# Altium PCB Mako DSP R1.0.PcbDoc
Units mil, origin at the board's own origin, x right, y up, seen from the top; angles counter-clockwise.
Board outline 3500 x 2100 mil, 2 copper layers (Top Layer, Bottom Layer); 165 components, 126 nets, 631 pads, 38 vias.
Unrouted connection lines stored in the file: 359.
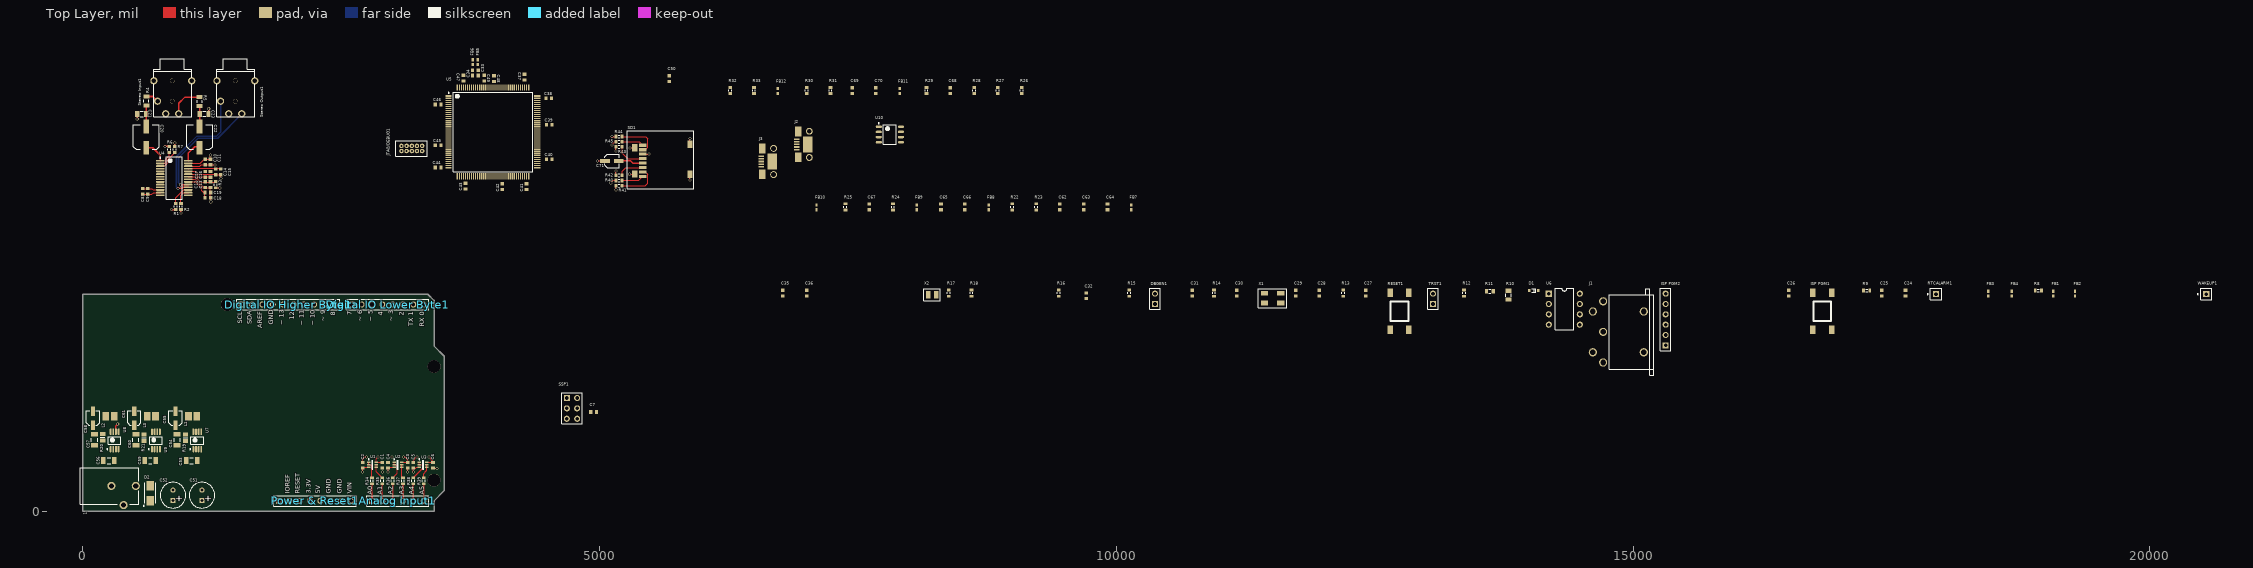
[diagram p0: Top Layer view]
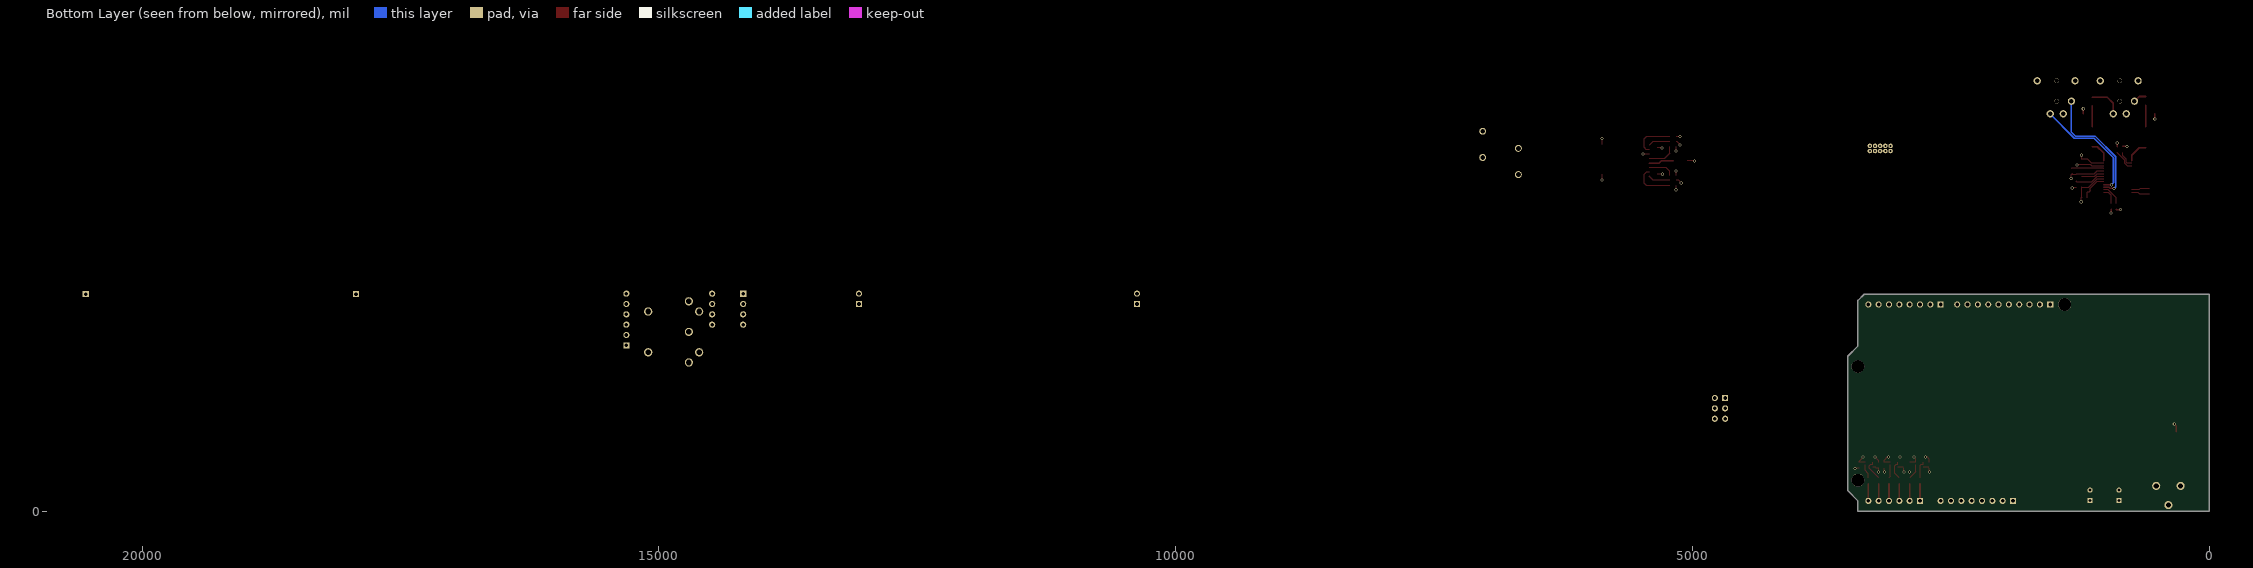
[diagram p1: Bottom Layer view, seen from below]

## Layer stack, top to bottom
Top Layer: signal copper 1.4
Dielectric: dielectric 12.6, FR-4, Dk 4.8
Bottom Layer: signal copper 1.4

## Board outline
0,0 0,2100 3340,2100 3400,2040 3400,1600 3500,1500 3500,200 3400,100 3400,0

## Design rules (kind name [scope] priority, off if disabled: settings)
Clearance [All] p1: gap=6
ComponentClearance [All] p1: gap=0 collisioncheckmode=3 verticalgap=10 showdistances=FALSE
DiffPairsRouting [All] p1: maxlimit=10 minlimit=10 mostfreqgap=10 maxuncoupledlength=500
FanoutControl Fanout_SOIC [(InComponent('U8') AND InComponent('U7'))] p3: bgadir=Out bgaviamode=Centered fanoutstyle=Staggered fanoutdirection=Alternating viagrid=1 // Fanout_SOIC (Default Rule)
FanoutControl Fanout_Small [All] p4: bgadir=Out bgaviamode=Centered fanoutstyle=Auto fanoutdirection=Alternating viagrid=1 // Fanout_Small (Default Rule)
HoleSize [All] p1: absolutevalues=TRUE maxlimit=120 minlimit=1 maxpercent=80.000 minpercent=20.000
MinimumSolderMaskSliver [All] p1 off: minsoldermaskwidth=10
PlaneConnect [All] p1: planeconnectstyle=Direct reliefexpansion=20 reliefentries=4 reliefconductorwidth=10 reliefairgap=10
PolygonConnect [All] p1: connectstyle=Relief reliefconductorwidth=10 reliefentries=4 polygonreliefangle="90 Angle"
RoutingVias [All] p1: holewidth=15 width=25 viastyle="Through Hole" minholewidth=15 minwidth=25 maxholewidth=28 maxwidth=50
SilkToSilkClearance [All] p1 off: silktosilkclearance=10
SilkscreenOverComponentPads [All] p1 off: minsilkscreentomaskgap=10
SolderMaskExpansion [All] p1: expansion=4
Width [All] p1: maxlimit=30 minlimit=6 preferedwidth=6 minimp=50.000000 maximp=50.000000 favimp=50.000000
19 further rules are at their usual default settings.

## Classes and differential pairs
component class "Mako DSP USB": C62 C63 C64 C65 C66 C67 C68 C69 C70 FB7 FB8 FB9 FB10 FB11 FB12 J2 J3 R22 R23 R24 R25 R26 R27 R28 R29 R30 R31 R32 R33 U10
component class "Mako DSP Power": 1 12VDC/VCCIN C51 C52 C53 C54 C55 C56 C57 C58 C59 C60 C61 D2 D? L1 L2 L3 L? R19 R20 R21 U7 U8 U9
component class "Mako DSP Main": C24 C25 C26 C27 C28 C29 C30 C31 C32 C33 C34 C35 C36 C37 C38 C39 C40 C41 C42 C43 C44 C45 C46 C47 C48 C49 C50 C71 D1 DBGEN1 FB1 FB2 FB3 FB4 FB5 FB6 "ISP PGM" "ISP PGM1" "ISP PGM2" J1 JTAG/DEBUG1 R8 R9 R10 R11 R12 R13 R14 R15 R16 R17 R18 R40 R41 R42 R43 R44 R45 RESET RESET1 RTCALARM1 SD1 TRST1 U5 U6 WAKEUP1 X1 X2
component class "Mako DSP Audio Codec": C8 C9 C10 C11 C12 C13 C14 C15 C16 C17 C18 C19 C20 C21 C22 C23 R1 R2 R3 R4 R5 R6 R7 "Stereo Input1" "Stereo Input?" "Stereo Output1" "Stereo Output?" U4
component class "Mako DSP Arduio IO": "Analog Input1" "Analog Input?" C1 C2 C3 C4 C5 C6 C7 "Digital IO Higher Byte1" "Digital IO Higher Byte?" "Digital IO Lower Byte1" "Digital IO Lower Byte?" "Power & Reset1" "Power & Reset?" R34 R35 R36 R37 R38 R39 SSP1 SSP? U1 U2 U3
differential pair USB0: +USB0_P -USB0_N
differential pair USB1: +USB1_P -USB1_N
differential pair USB_1: +USB_1_P -USB_1_N

## Components (designator, comment, footprint, x,y, rotation, side; value= is the part's Value field where it differs from the comment)
1 "Center-positive 2.1 mm power jack" PJ-102AH 515,245 r90 top
"Analog Input1" "Arduino Leonardo Analog" "Arduino Leonardo Analog" 2800,100 r0 top locked
C1 "Cap Semi" 1608[0603] 2900,445 r90 top
C2 "Cap Semi" 1608[0603] 2710,445 r270 top
C3 "Cap Semi" 1608[0603] 3145,445 r90 top
C4 "Cap Semi" 1608[0603] 2955,445 r270 top
C5 "Cap Semi" 1608[0603] 3200,445 r270 top
C6 "Cap Semi" 1608[0603] 3390,445 r90 top
C7 "Cap Semi" 1608[0603] 4945,960 r0 top
C8 "Cap Semi" 1608[0603] 582.01,3093.9 r270 top
C9 "Cap Semi" 1608[0603] 632.01,3093.9 r270 top
C10 "Cap Semi" 1608[0603] 1187.01,3378.9 r270 top
C11 "Cap Semi" 1608[0603] 1237.01,3378.9 r270 top
C12 "Cap Semi" 1608[0603] 1187.01,3158.9 r90 top
C13 "Cap Semi" 1608[0603] 1237.01,3158.9 r90 top
C14 "Cap Semi" 1608[0603] 1287.01,3283.9 r90 top
C15 "Cap Semi" 1608[0603] 1337.01,3283.9 r90 top
C16 "Cap Semi" 1608[0603] 1237.01,3258.9 r270 top
C17 "Cap Semi" 1608[0603] 1187.01,3258.9 r270 top
C18 "Cap Semi" 1608[0603] 1212.01,3033.9 r180 top
C19 "Cap Semi" 1608[0603] 1212.01,3083.9 r180 top
C20 "Cap Semi" "Panasonic VS D" 617.01,3618.9 r270 top
C21 "Cap Semi" "SM 0805 - gap trimmed" 572.01,3843.9 r0 top
C22 "Cap Semi" "Panasonic VS D" 1132.01,3618.9 r270 top
C23 "Cap Semi" "SM 0805 - gap trimmed" 1177.01,3843.9 r180 top
C24 "Cap Semi" 1608[0603] 17635,2110 r90 top
C25 "Cap Semi" 1608[0603] 17405,2110 r90 top
C26 "Cap Semi" CAPC1608L 16505,2110 r90 top
C27 "Cap Semi" CAPC1608L 12415,2110 r90 top
C28 "Cap Semi" CAPC1608L 11965,2110 r90 top
C29 "Cap Semi" CAPC1608L 11735,2110 r90 top
C30 "Cap Semi" 1608[0603] 11165,2110 r90 top
C31 "Cap Semi" 1608[0603] 10735,2110 r90 top
C32 "Cap Semi" CAPC1608L 9710,2085 r90 top
C33 "Cap Semi" 1608[0603] 3800,4265 r180 top
C34 "Cap Semi" 1608[0603] 3800,4215 r180 top
C35 "Cap Semi" 1608[0603] 6775,2110 r90 top
C36 "Cap Semi" 1608[0603] 7005,2110 r90 top
C37 "Cap Semi" 1608[0603] 4275,4200 r270 top
C38 "Cap Semi" 1608[0603] 4510,3995 r180 top
C39 "Cap Semi" 1608[0603] 4515,3740 r180 top
C40 "Cap Semi" 1608[0603] 4515,3405 r180 top
C41 "Cap Semi" 1608[0603] 4295,3140 r90 top
C42 "Cap Semi" 1608[0603] 4060,3140 r90 top
C43 "Cap Semi" 1608[0603] 3705,3145 r90 top
C44 "Cap Semi" 1608[0603] 3440,3325 r0 top
C45 "Cap Semi" 1608[0603] 3440,3540 r0 top
C46 "Cap Semi" 1608[0603] 3440,3935 r0 top
C47 "Cap Semi" 1608[0603] 3685,4190 r270 top
C48 "Cap Semi" 1608[0603] 3980,4185 r270 top
C49 "Cap Semi" 1608[0603] 3885,4190 r270 top
C50 "Cap Semi" 1608[0603] 5675,4185 r90 top
C51 "Cap Pol1" CAPPR2.5-6.3x5 1155,155 r90 top
C52 "Cap Pol1" CAPPR2.5-6.3x5 875,155 r90 top
C53 "Cap Semi" C1206 1055,490 r0 top
C54 "Cap Semi" C1206 915,690 r90 top
C55 "Cap Semi" "Panasonic VS B" 900,900 r270 top
C56 "Cap Semi" C1206 255,490 r0 top
C57 "Cap Semi" C1206 115,690 r90 top
C58 "Cap Semi" "Panasonic VS B" 100,900 r270 top
C59 "Cap Semi" C1206 655,490 r0 top
C60 "Cap Semi" C1206 515,690 r90 top
C61 "Cap Semi" "Panasonic VS B" 500,900 r270 top
C62 "Cap Semi" 1608[0603] 9455,2945 r90 top
C63 "Cap Semi" 1608[0603] 9685,2945 r90 top
C64 "Cap Semi" 1608[0603] 9915,2945 r90 top
C65 "Cap Semi" 1608[0603] 8305,2945 r90 top
C66 "Cap Semi" 1608[0603] 8535,2945 r90 top
C67 "Cap Semi" 1608[0603] 7610,2945 r90 top
C68 "Cap Semi" 1608[0603] 8395,4070 r90 top
C69 "Cap Semi" 1608[0603] 7445,4070 r90 top
C70 "Cap Semi" 1608[0603] 7675,4070 r90 top
C71 "Cap Semi" "Panasonic VS B" 5120,3390 r180 top
D1 "Diode" "SMT diode" 14040,2135 r0 top
D2 "PMEG4050EP" PMEG4050EP 655,175 r90 top
DBGEN1 "Header 2" HDR1X2 10375,2005 r90 top
"Digital IO Higher Byte1" "Arduino Leonardo High Byte" "Arduino Leonardo High Byte" 1540,2000 r0 top locked
"Digital IO Lower Byte1" "Arduino Leonardo Low Byte" "Arduino Leonardo Low Byte" 2600,2000 r0 top locked
FB1 "BLM15HG601SN1D" BLM18PG121SN1D 19065,2105 r90 top
FB2 "BLM15HG601SN1D" BLM18PG121SN1D 19275,2105 r90 top
FB3 "BLM15HG601SN1D" BLM18PG121SN1D 18435,2105 r90 top
FB4 "BLM15HG601SN1D" BLM18PG121SN1D 18665,2105 r90 top
FB5 "BLM15HG601SN1D" BLM18PG121SN1D 3825,4345 r270 top
FB6 "BLM15HG601SN1D" BLM18PG121SN1D 3775,4345 r270 top
FB7 "BLM15HG601SN1D" BLM18PG121SN1D 10145,2940 r90 top
FB8 "BLM15HG601SN1D" BLM18PG121SN1D 8765,2940 r90 top
FB9 "BLM15HG601SN1D" BLM18PG121SN1D 8070,2940 r90 top
FB10 "BLM15HG601SN1D" BLM18PG121SN1D 7100,2940 r90 top
FB11 "BLM15HG601SN1D" BLM18PG121SN1D 7905,4065 r90 top
FB12 "BLM15HG601SN1D" BLM18PG121SN1D 6725,4065 r90 top
"ISP PGM1" "Tactile Switch" TL3301 16830,1935 r0 top
"ISP PGM2" "Header 6" HDR1X6 15315,1605 r90 top
J1 "5 Pin DIN jack" "Kobiconn 5 pin DIN" 14710,1735 r90 top
J2 "DX4R005J91R5100" "Micro USB Circular Holes Only" 7070,3550 r90 top
J3 "DX4R005J91R5100" "Micro USB Circular Holes Only" 6725,3385 r90 top
JTAG/DEBUG1 "S9015E-05-ND" S9015E-05-ND 3285,3485 r180 top
L1 "Inductor" VLS252012T-2R2M1R3 1065,920 r180 top
L2 "Inductor" VLS252012T-2R2M1R3 265,920 r180 top
L3 "Inductor" VLS252012T-2R2M1R3 665,920 r180 top
"Power & Reset1" "Arduino Leonardo Power" "Arduino Leonardo Power" 1900,100 r0 top locked
R1 "Res3" J1-0603 902.01,2948.9 r270 top
R2 "Res3" J1-0603 952.01,2948.9 r270 top
R3 "Res3" J1-0603 1287.01,3158.9 r270 top
R4 "Res3" "SM 0805 - gap trimmed" 617.01,3968.9 r90 top
R5 "Res3" "SM 0805 - gap trimmed" 1132.01,3963.9 r90 top
R6 "Res3" J1-0603 837.01,3498.9 r270 top
R7 "Res3" J1-0603 892.01,3498.9 r270 top
R8 "Res3" J1-0603 18920,2135 r0 top
R9 "Res3" J1-0603 17260,2135 r0 top
R10 "res 220" "SM 0805 - gap trimmed" 13795,2090 r90 top
R11 "res 1k" "SM 0603" 13580,2130 r0 top
R12 "Res3" J1-0603 13365,2110 r90 top
R13 "Res3" J1-0603 12195,2110 r90 top
R14 "Res3" J1-0603 10945,2110 r90 top
R15 "Res3" J1-0603 10125,2110 r90 top
R16 "Res3" J1-0603 9445,2110 r90 top
R17 "Res3" J1-0603 8380,2110 r90 top
R18 "Res3" J1-0603 8600,2110 r90 top
R19 "Res3" RESC2012L 995,710 r90 top
R20 "Res3" RESC2012L 195,715 r90 top
R21 "Res3" RESC2012L 595,710 r90 top
R22 "Res3" J1-0603 8995,2945 r90 top
R23 "Res3" J1-0603 9225,2945 r90 top
R24 "Res3" J1-0603 7840,2945 r90 top
R25 "Res3" J1-0603 7380,2945 r90 top
R26 "Res3" J1-0603 9085,4070 r90 top
R27 "Res3" J1-0603 8855,4070 r90 top
R28 "Res3" J1-0603 8625,4070 r90 top
R29 "Res3" J1-0603 8165,4070 r90 top
R30 "Res3" J1-0603 7005,4070 r90 top
R31 "Res3" J1-0603 7235,4070 r90 top
R32 "Res3" J1-0603 6265,4070 r90 top
R33 "Res3" J1-0603 6495,4070 r90 top
R34 "Res3" J1-0603 2800,295 r90 top
R35 "Res3" J1-0603 2900,295 r90 top
R36 "Res3" J1-0603 3000,295 r90 top
R37 "Res3" J1-0603 3100,295 r90 top
R38 "Res3" J1-0603 3200,295 r90 top
R39 "Res3" J1-0603 3300,295 r90 top
R40 "Res3" J1-0603 5190,3200 r0 top
R41 "Res3" J1-0603 5190,3150 r0 top
R42 "Res3" J1-0603 5190,3250 r0 top
R43 "Res3" J1-0603 5190,3525 r0 top
R44 "Res3" J1-0603 5190,3625 r0 top
R45 "Res3" J1-0603 5190,3575 r0 top
RESET1 "Tactile Switch" TL3301 12740,1935 r0 top
RTCALARM1 "Socket" PIN1 17930,2100 r90 top
SD1 "JAE SJ107021" "JAE SJ107021" 5875,3390 r0 top
SSP1 "Arduino Leonardo ICSP" "Arduino ICPS" 4685,1095 r0 top
"Stereo Input1" "CUI 43515TS" "CUI SJ-43515TS" 867.01,4163.9 r270 top
"Stereo Output1" "CUI 43515TS" "CUI SJ-43515TS" 1477.01,4163.9 r270 top
TRST1 "Header 2" HDR1X2 13065,2005 r90 top
U1 "BAV70S SOT-363" BAV70S_SOT363 2805,450 r0 top
U2 "BAV70S SOT-363" BAV70S_SOT363 3050,450 r0 top
U3 "BAV70S SOT-363" BAV70S_SOT363 3295,450 r0 top
U4 "WM8778" WM8778 887.01,3223.9 r0 top
U5 "LPC4330FBD144" SOT486-1_V 3970,3670 r0 top
U6 "6N138 optocoupler" DIP8 14185,2105 r0 top
U7 "TPS62162SOP" TPS62162SOP 1110,685 r90 top
U8 "TPS62163SOP" TPS62162SOP 310,685 r90 top
U9 "TPS62162SOP" TPS62162SOP 710,685 r90 top
U10 "LM3526-H" LM3526 7810,3645 r0 top
WAKEUP1 "Socket" PIN1 20545,2100 r90 top
X1 "ABM3B-12.000MHZ-B2-T" ABM3B-12.000MHZ-B2-T 11435,2015 r0 top
X2 "ABS07-32.768KHZ-T" ABS07-32.768KHZ-T 8180,2095 r0 top

## Footprints (in the part's own frame and the unit in brackets; to place one, negate y for a bottom-side part, rotate by r counter-clockwise, add the part's x,y. Pads: shape width x height; smd on the part's side, far side on the other; paste and mask are expansions set on the pad)
1608[0603] [mm] "Chip Capacitor, Body 1.6x0.8mm, IPC High Density"
  rect 0.8x0.9 smd: 1(-0.7,0) 2(0.7,0)
  body extent -0.87,-0.48 0.87,0.48, height 1.3
ABM3B-12.000MHZ-B2-T [mm] "ABM3B-12.000MHZ-B2-T 12MHZ Crystam Oscillator"
  rect 1.8x1.2 smd: 1(0,0) 2(4,0) 3(4,2.4) 4(0,2.4)
  silkscreen extent -1.5,-1.2 5.5,3.5
ABS07-32.768KHZ-T [mm] "ABS07-32.768KHZ-T Crystal Oscillator"
  rect 1.1x1.9 smd: 1(0,0) 2(1.95,0)
  silkscreen extent -1.1,-1.5 3,1.5
"Arduino ICPS" [mm]
  round 1 on Top Overlay: 1(-1.778,1.778)
  rect 1.5x1.5 hole 0.9: 1(0,0)
  round 1.5 hole 0.9: 2(2.54,0) 3(0,-2.54) 4(2.54,-2.54) 5(0,-5.08) 6(2.54,-5.08)
  silkscreen extent -1.27,-6.35 3.81,1.27
"Arduino Leonardo Analog" [mm] "Connector; Header; 6 Position"
  rect 1.5x1.5 hole 0.9: 1(0,0)
  round 1.5 hole 0.9: 2(2.54,0) 3(5.08,0) 4(7.62,0) 5(10.16,0) 6(12.7,0)
  silkscreen extent -1.27,-1.27 13.97,1.27
"Arduino Leonardo High Byte" [mm]
  rect 1.5x1.5 hole 0.9: 1(0,0)
  round 1.5 hole 0.9: 2(2.54,0) 3(5.08,0) 4(7.62,0) 5(10.16,0) 6(12.7,0) 7(15.24,0) 8(17.78,0) 9(20.32,0) 10(22.86,0)
  silkscreen extent -1.27,-1.27 24.13,1.27
"Arduino Leonardo Low Byte" [mm] "Connector; Header; 8 Position"
  rect 1.5x1.5 hole 0.9: 1(0,0)
  round 1.5 hole 0.9: 2(2.54,0) 3(5.08,0) 4(7.62,0) 5(10.16,0) 6(12.7,0) 7(15.24,0) 8(17.78,0)
  silkscreen extent -1.27,-1.27 19.05,1.27
"Arduino Leonardo Power" [mm] "Connector; Header; 8 Position"
  rect 1.5x1.5 hole 0.9: 1(0,0)
  round 1.5 hole 0.9: 2(2.54,0) 3(5.08,0) 4(7.62,0) 5(10.16,0) 6(12.7,0) 7(15.24,0) 8(17.78,0)
  silkscreen extent -1.27,-1.27 19.05,1.27
BAV70S_SOT363 [mm] "SOT23, 6-Leads, Body 2.2x2.2mm (max), Pitch 0.65mm, IPC Medium Density"
  rect 0.85x0.35 smd: 1(-0.925,0.65) 2(-0.925,0) 3(-0.925,-0.65) 4(0.925,-0.65) 5(0.925,0) 6(0.925,0.65)
  silkscreen extent -1.05,-1.1 0.1,1.5, body extent -0.67,-1.1 0.67,1.1, height 1.1
BLM18PG121SN1D [mm] "Chip Inductor, 2-Leads, Body 1.0x0.5mm, IPC Medium Density"
  rect 0.8x0.6 smd: 1(-0.6,0) 2(0.6,0)
  body extent -0.52,-0.28 0.53,0.27, height 0.6
C1206 [mm] "Chip Capacitor, Body 3.2x1.6mm, IPC High Density"
  rect 1.1x1.7 smd: 1(-1.35,0) 2(1.35,0)
  silkscreen extent -0.4,-0.75 0.4,0.75, body extent -1.7,-0.9 1.7,0.9, height 1.3
CAPC1608L [mm] "Chip Capacitor, Body 1.6x0.8mm, IPC High Density"
  rect 0.8x0.9 smd: 1(-0.7,0) 2(0.7,0)
  body extent -0.87,-0.48 0.87,0.48, height 0.85
CAPPR2.5-6.3x5 [mm] "Capacitor, Electrolytic, Radial; Body 6.3 x 5 mm (Dia.xH typ); Pin Spacing 2.5 mm (typ)"
  rect 1.25x1.25 hole 0.75: 1(-1.25,0)
  round 1.25 hole 0.75: 2(1.25,0)
  silkscreen extent -3.15,-3.15 3.15,3.15
"CUI SJ-43515TS" [mm]
  round 1.778 hole 1.1: 1(8.1,1.6) 3(8.1,-1.6) 4(5,-3.6) 5(0,4.8) 6(0,-4.5)
  round 1.1 hole 1.1: ""(0,0) ""(5,0)
  silkscreen extent -5.4,-4.5 8.8,4.8
DIP8 [mil]
  rect 60x60 hole 35: 1(0,0)
  round 60 hole 35: 2(0,-100) 3(0,-200) 4(0,-300) 5(300,-300) 6(300,-200) 7(300,-100) 8(300,0)
  silkscreen extent 60,-350 240,50
HDR1X2 [mm] "Connector; Header; 2 Position"
  rect 1.5x1.5 hole 0.9: 1(0,0)
  round 1.5 hole 0.9: 2(2.54,0)
  silkscreen extent -1.27,-1.27 3.81,1.27
HDR1X6 [mm] "Connector; Header; 6 Position"
  rect 1.5x1.5 hole 0.9: 1(0,0)
  round 1.5 hole 0.9: 2(2.54,0) 3(5.08,0) 4(7.62,0) 5(10.16,0) 6(12.7,0)
  silkscreen extent -1.27,-1.27 13.97,1.27
J1-0603 [mm] "Chip Resistor, Body 1.6x0.8mm, IPC High Density"
  rect 0.7x0.9 smd: 1(-0.75,0) 2(0.75,0)
  silkscreen extent -0.2,-0.35 0.2,0.35, body extent -0.85,-0.48 0.85,0.48, height 0.9
"JAE SJ107021" [mm] "MicroSD card socket"
  rect 1.8x0.8 smd: 1(-11.55,-3.85) 2(-11.55,-2.75) 3(-11.55,-1.65) 4(-11.55,-0.55) 5(-11.55,0.55) 6(-11.55,1.65) 7(-11.55,2.75) 8(-11.55,3.85)
  rect 1.2x1.8 smd: 9(0,-3.3) 10(0,4.05)
  rect 1.4x1.8 smd: 11(-13.55,-3.25) 12(-13.55,3.25)
  silkscreen extent -15.35,-6.8 0.95,7.45, body extent -15.25,-6.75 1,7.5, height 2
"Kobiconn 5 pin DIN" [mil]
  round 80 hole 55: 1(295.5,0) 2(0,0) 3(-295.5,0) 4(197,99) 5(-197,99) E(-197,-394) E(197,-394)
  silkscreen extent -420,-492 419,-60
LM3526 [mm] "TSOP, 8-Leads, Body 4.9x3.9mm (max), Pitch 1.27mm, IPC Medium Density"
  oval 1.5x0.6 smd: 1(-2.725,1.905) 2(-2.725,0.635) 3(-2.725,-0.635) 4(-2.725,-1.905) 5(2.725,-1.905) 6(2.725,-0.635) 7(2.725,0.635) 8(2.725,1.905)
  silkscreen extent -2.85,-2.45 1.57,2.88, body extent -1.95,-2.45 1.95,2.45, height 1.45
"Micro USB Circular Holes Only" [mm]
  rect 0.4x1.35 smd: 1(1.275,4.025) 2(0.625,4.025) 3(-0.025,4.025) 4(-0.675,4.025) 5(-1.325,4.025)
  rect 2.4x1.6 smd: 6(3.125,3.75) 9(-3.175,3.75)
  round 1.7 hole 1.2: 7(3.2,1) 8(-3.25,1)
  rect 4x2.3 smd: GND(-0.025,1.35)
"Panasonic VS B" [mm]
  rect 2.4x1 smd: 1(1.7,0) 2(-1.7,0)
  silkscreen extent -1.83,-1.65 1.78,1.65
"Panasonic VS D" [mm]
  rect 3.4x1.4 smd: 1(2.6,0) 2(-2.6,0)
  silkscreen extent -3,-3.2 3,3.2
PIN1 [mm] "Connector; Plug"
  rect 1.5x1.5 hole 0.9: 1(0,0)
  silkscreen extent -1.4,-1.4 1.4,2.17
PJ-102AH [mm] "Center positive 2.1 mm power jack"
  round 2 hole 1.27: 1(0,0) 2(0,6) 3(-4.7,3)
  silkscreen extent -4.5,-0.7 4.5,13.7, body extent -5.8,-0.7 4.5,13.7, height 11
PMEG4050EP [mm] "PMEG4050EP NXP SMD Schottky Diode"
  rect 2.35x1.85 smd: 1(-1.825,0) 2(1.825,0)
  silkscreen extent -3.27,-1.4 2.5,1.67, body extent -2.5,-1.35 2.5,1.35, height 1.1
RESC2012L [mm] "Chip Resistor, Body 2.0x1.3mm, IPC High Density"
  rect 1x1.3 smd: 1(-0.8,0) 2(0.8,0)
  silkscreen extent 0,-0.55 0,0.55, body extent -1.07,-0.7 1.07,0.7, height 0.65
S9015E-05-ND [mm] "10 Pin Cortex JTAG Debug Header"
  round 1.1 hole 0.508: 1(5.08,0) 2(5.08,-1.27) 3(3.81,0) 4(3.81,-1.27) 5(2.54,0) 6(2.54,-1.27) 7(1.27,0) 8(1.27,-1.27) 9(0,0) 10(0,-1.27)
  round 0.5 on Top Overlay: 1(7,0.8)
  silkscreen extent -1.25,-2.5 6.5,1.25
"SM 0603" [mm]
  rect 0.75x1.1 smd: 1(0,0) 2(1.704,0)
  silkscreen extent 0.6,-0.5 1.1,0.5
"SM 0805 - gap trimmed" [mm]
  rect 1x1.5 smd: 1(-1.1,0) 2(1.1,0)
  silkscreen extent -0.36,-0.64 0.35,0.63
"SMT diode" [mm]
  rect 0.63x0.83 smd: 1(-1.115,0) 2(1.115,0)
  silkscreen extent -0.5,-0.4 0.5,0.5
SOT486-1_V [mm] "Thin QFP, 144-Leads, Body 20x20mm, Pitch 0.5mm, NXP Recommended"
  rect 1.5x0.4 smd: 1(-10.9,8.81) 36(-10.9,-8.81) 73(10.9,-8.81) 108(10.9,8.81)
  rect 1.5x0.28 smd: 2(-10.9,8.25) 3(-10.9,7.75) 4(-10.9,7.25) 5(-10.9,6.75) 6(-10.9,6.25) 7(-10.9,5.75) 8(-10.9,5.25) 9(-10.9,4.75) 10(-10.9,4.25) 11(-10.9,3.75) 12(-10.9,3.25) 13(-10.9,2.75) 14(-10.9,2.25) 15(-10.9,1.75) 16(-10.9,1.25) 17(-10.9,0.75) 18(-10.9,0.25) 19(-10.9,-0.25) 20(-10.9,-0.75) 21(-10.9,-1.25) 22(-10.9,-1.75) 23(-10.9,-2.25) 24(-10.9,-2.75) 25(-10.9,-3.25) 26(-10.9,-3.75) 27(-10.9,-4.25) 28(-10.9,-4.75) 29(-10.9,-5.25) 30(-10.9,-5.75) 31(-10.9,-6.25) 32(-10.9,-6.75) 33(-10.9,-7.25) 34(-10.9,-7.75) 35(-10.9,-8.25) 74(10.9,-8.25) 75(10.9,-7.75) 76(10.9,-7.25) 77(10.9,-6.75) 78(10.9,-6.25) 79(10.9,-5.75) 80(10.9,-5.25) 81(10.9,-4.75) 82(10.9,-4.25) 83(10.9,-3.75) 84(10.9,-3.25) 85(10.9,-2.75) 86(10.9,-2.25) 87(10.9,-1.75) 88(10.9,-1.25) 89(10.9,-0.75) 90(10.9,-0.25) 91(10.9,0.25) 92(10.9,0.75) 93(10.9,1.25) 94(10.9,1.75) 95(10.9,2.25) 96(10.9,2.75) 97(10.9,3.25) 98(10.9,3.75) 99(10.9,4.25) 100(10.9,4.75) 101(10.9,5.25) 102(10.9,5.75) 103(10.9,6.25) 104(10.9,6.75) 105(10.9,7.25) 106(10.9,7.75) 107(10.9,8.25)
  rect 0.4x1.5 smd: 37(-8.81,-10.9) 72(8.81,-10.9) 109(8.81,10.9) 144(-8.81,10.9)
  rect 0.28x1.5 smd: 38(-8.25,-10.9) 39(-7.75,-10.9) 40(-7.25,-10.9) 41(-6.75,-10.9) 42(-6.25,-10.9) 43(-5.75,-10.9) 44(-5.25,-10.9) 45(-4.75,-10.9) 46(-4.25,-10.9) 47(-3.75,-10.9) 48(-3.25,-10.9) 49(-2.75,-10.9) 50(-2.25,-10.9) 51(-1.75,-10.9) 52(-1.25,-10.9) 53(-0.75,-10.9) 54(-0.25,-10.9) 55(0.25,-10.9) 56(0.75,-10.9) 57(1.25,-10.9) 58(1.75,-10.9) 59(2.25,-10.9) 60(2.75,-10.9) 61(3.25,-10.9) 62(3.75,-10.9) 63(4.25,-10.9) 64(4.75,-10.9) 65(5.25,-10.9) 66(5.75,-10.9) 67(6.25,-10.9) 68(6.75,-10.9) 69(7.25,-10.9) 70(7.75,-10.9) 71(8.25,-10.9) 110(8.25,10.9) 111(7.75,10.9) 112(7.25,10.9) 113(6.75,10.9) 114(6.25,10.9) 115(5.75,10.9) 116(5.25,10.9) 117(4.75,10.9) 118(4.25,10.9) 119(3.75,10.9) 120(3.25,10.9) 121(2.75,10.9) 122(2.25,10.9) 123(1.75,10.9) 124(1.25,10.9) 125(0.75,10.9) 126(0.25,10.9) 127(-0.25,10.9) 128(-0.75,10.9) 129(-1.25,10.9) 130(-1.75,10.9) 131(-2.25,10.9) 132(-2.75,10.9) 133(-3.25,10.9) 134(-3.75,10.9) 135(-4.25,10.9) 136(-4.75,10.9) 137(-5.25,10.9) 138(-5.75,10.9) 139(-6.25,10.9) 140(-6.75,10.9) 141(-7.25,10.9) 142(-7.75,10.9) 143(-8.25,10.9)
  silkscreen extent -11.02,-9.75 9.75,9.75, body extent -10,-10 10,10, height 1.6
TL3301 [mm]
  rect 1.4x2.1 smd: 1(-2.3,-4.5) 1(-2.3,4.5) 2(2.3,-4.5) 2(2.3,4.5)
  silkscreen extent -2.2,-2.4 2.2,2.4
TPS62162SOP [mm] "SOP 8 pin package"
  oval 1.6x0.45 smd: 1(-2.125,0.975) 2(-2.125,0.325) 3(-2.125,-0.325) 4(-2.125,-0.975) 5(2.125,-0.975) 6(2.125,-0.325) 7(2.125,0.325) 8(2.125,0.975)
  silkscreen extent -2.25,-1.55 0.92,1.87, body extent -1.55,-1.55 1.55,1.55, height 1.1
VLS252012T-2R2M1R3 [mm] "Precision Wire Wound Inductor, 2-Leads, Body 2.5x2.0mm, IPC Medium Density"
  rect 1.65x2.1 smd: 1(-1.025,0) 2(1.025,0)
  body extent -1.3,-1.05 1.3,1.05, height 1.2
WM8778 [mm] "SOP, 28 Pin Wolfson Audio WM8778 Audio Codec"
  oval 2.1x0.45 smd: 1(-3.45,4.225) 2(-3.45,3.575) 3(-3.45,2.925) 4(-3.45,2.275) 5(-3.45,1.625) 6(-3.45,0.975) 7(-3.45,0.325) 8(-3.45,-0.325) 9(-3.45,-0.975) 10(-3.45,-1.625) 11(-3.45,-2.275) 12(-3.45,-2.925) 13(-3.45,-3.575) 14(-3.45,-4.225) 15(3.45,-4.225) 16(3.45,-3.575) 17(3.45,-2.925) 18(3.45,-2.275) 19(3.45,-1.625) 20(3.45,-0.975) 21(3.45,-0.325) 22(3.45,0.325) 23(3.45,0.975) 24(3.45,1.625) 25(3.45,2.275) 26(3.45,2.925) 27(3.45,3.575) 28(3.45,4.225)
  silkscreen extent -3.57,-5.25 2,5.25, body extent -2.8,-5.25 2.8,5.25, height 2

## Part data
1: library part PWR2.5, "Power jack"
C1 C2 C3 C4 C5 C6 C7 C8 C9 C10 C11 C12 C13 C14 C15 C16 C17 C18 C19 C20 C21 C22 C23 C24 C25 C26 C27 C28 C29 C30 C31 C32 C33 C34 C35 C36 C37 C38 C39 C40 C41 C42 C43 C44 C45 C46 C47 C48 C49 C50 C53 C54 C55 C56 C57 C58 C59 C60 C61 C62 C63 C64 C65 C66 C67 C68 C69 C70 C71: "Capacitor (Semiconductor SIM Model)"
C51 C52: "Polarized Capacitor (Radial)"
D1: "Default Diode"
D2: library part Diode, "Default Diode"
DBGEN1 TRST1: "Header, 2-Pin"
"ISP PGM2": "Header, 6-Pin"
J1: library part "Kobiconn 5 pin DIN"
J2 J3: library part "Micro USB", "Micro USB Jack B"
R1 R2 R3 R4 R5 R6 R7 R8 R9 R12 R13 R14 R15 R16 R17 R18 R19 R20 R21 R22 R23 R24 R25 R26 R27 R28 R29 R30 R31 R32 R33 R34 R35 R36 R37 R38 R39 R40 R41 R42 R43 R44 R45: "Resistor"
R10 R11: library part Res1, "Resistor"
SD1: library part "JAE SJ107021 microSD Card Socket"
U5: "32-bit ARM Cortex-M4 MCU, 264 kB SRAM, 2 HS USB with on-chip PHY, Ethernet, CAN, AES, SPIFI, SGPIO, SCT, 144-Pin LQFP"
U8: library part TPS62162SOP
U10: library part LM3526
X2: "ABS07-32.768KHZ-T RTC Crystal Oscillator"

## Free pads (board coordinates)
  round 125.1 hole 125.1: 0(1400,2000) 0(3400,300) 0(3400,1400)

## Via types
v1: diameter 30, hole 20, Top Layer to Bottom Layer, 38 vias

## Nets (pads, with @x,y where several pads share a name; then routed paths per layer and width w, separated by ;. In a path a pad name is that pad's centre, name@x,y a point inside that pad or via, vN(x,y) a via of type N, cw(c..) or ccw(c..) an arc to the next point about the centre after c; other vN are vias at no path point)
5VCC: "Power & Reset1.5" C57.2 C58.1 C62.2 L2.2 R20.2 R22.1 R23.1 U8.6 U10.7 | length 83.5
  Top Layer w15: U8.6 322.8,827.8 v1(340,845)
AVDD: C1.2 C2.2 C3.2 C4.2 C5.2 C6.2 C10.2 C11.2 C54.2 C55.1 FB5.1 L1.2 R3.2 R19.2 U1.3 U1.6 U2.3 U2.6 U3.3 U3.6 U4.26 U7.6 | length 980.4
  Top Layer w10: U4.26 1134.79,3339.06 1147.08,3351.34 C10.2 C11.2 1279.57,3351.34 v1(1280.01,3350.9) ; R3.2 1287.48,3128.9 v1(1327.01,3128.9) ; v1(2710,380) C2.2 2716.97,424.41 U1.3 ; v1(2860,525) 2841.42,506.42 U1.6 2896.97,475.59 C1.2 ; v1(2955,380) C4.2 2961.97,424.41 U2.3 ; U2.6 3141.97,475.59 C3.2 3145,495 3115,525 v1(3105,525) ; v1(3200,380) C5.2 3222.44,417.44 3230,425 3257.99,425 U3.3 ; U3.6 3386.97,475.59 C6.2 3390,485 v1(3350,525)
DVDD: "ISP PGM2.3" "Power & Reset1.2" "Power & Reset1.4" C7.2 C8.2 C9.2 C27.2 C28.2 C32.1 C37.2 C38.2 C39.2 C40.2 C41.2 C42.2 C43.2 C44.2 C45.2 C46.2 C47.2 C48.2 C49.2 C50.2 C60.2 C61.1 C71.2 DBGEN1.1 FB1.1 FB2.1 JTAG/DEBUG1.1@3085,3485 L3.2 R1.2 R2.2 R6.1 R7.1 R9.2 R11.1 R12.2 R17.2 R18.2 R21.2 R40.1 R41.1 R42.1 R43.1 R44.1 R45.1 SD1.4 SSP1.4 TRST1.1 U4.13 U5.5 U5.25 U5.36 U5.41 U5.59 U5.71 U5.77 U5.94 U5.107 U5.111 U5.127 U5.131 U5.141 U6.8 U9.6 | length 843.9
  Top Layer w10: C8.2 C9.2 669.45,3066.34 686.26,3083.15 U4.13 ; v1(5110,3175) 5135,3200 R40.1 ; v1(5120,3545) 5150,3575 R45.1 ; v1(5120,3625) R44.1 ; v1(5160,3110) 5160,3149.53 R41.1 ; v1(5160,3290) 5160.47,3289.53 R42.1 ; v1(5160,3485) 5160.47,3485.47 R43.1
  Top Layer w15: v1(797.01,3528.9) R6.1@836.54,3528.9 ; v1(862.01,2918.9) 901.54,2918.9 R1.2 ; R7.1 v1(892.01,3563.9) ; v1(952.01,2883.9) R2.2 ; C71.2 5300,3390 5321.65,3368.35 SD1.4
GND: 1.2 1.3 "Digital IO Higher Byte1.4" "ISP PGM1.2" "ISP PGM2.1" "Power & Reset1.6" "Power & Reset1.7" "Stereo Input1.5" "Stereo Output1.5" C1.1 C2.1 C3.1 C4.1 C5.1 C6.1 C7.1 C8.1 C9.1 C10.1 C11.1 C12.1 C13.1 C14.1 C15.1 C16.1 C17.1 C18.1 C19.1 C21.1 C23.1 C24.1 C25.1 C26.1 C27.1 C28.1 C29.1 C30.2 C31.1 C32.2 C35.1 C36.1 C37.1 C38.1 C39.1 C40.1 C41.1 C42.1 C43.1 C44.1 C45.1 C46.1 C47.1 C48.1 C49.1 C50.1 C51.2 C52.2 C53.1 C54.1 C55.2 C56.1 C57.1 C58.2 C59.1 C60.1 C61.2 C62.1 C63.1 C64.1 C65.1 C66.1 C67.1 C68.1 C69.1 C70.1 C71.1 FB3.2 FB4.2 FB6.1 FB11.2 FB12.2 J2.5 J3.5 JTAG/DEBUG1.3 JTAG/DEBUG1.5 JTAG/DEBUG1.9 R8.1 R14.1 R16.1 R25.2 R29.2 R30.2 R31.2 R32.2 R33.2 RESET1.2 SD1.6 SD1.9 SD1.10 SD1.11 SD1.12 SSP1.6 U4.12 U4.21 U4.24 U4.27 U5.4 U5.40 U5.76 U5.109 U6.5 U7.1 U7.4 U7.5 U8.1 U8.4 U8.5 U9.1 U9.4 U9.5 U10.6 X1.2 X1.4 | length 1871.6
  Top Layer w10: C8.1 C9.1 669.45,3121.46 682.17,3108.74 U4.12 ; U4.21 1092.18,3211.1 1174.38,3128.9 1229.57,3128.9 C13.1@1237.01,3136.34 ; U4.24 1088.03,3287.87 1117.01,3258.9 C14.1@1287.01,3258.9 ; U4.27 1137.76,3364.65 1179.57,3406.46 C10.1 C11.1 v1(1237.01,3443.9) ; C13.1 1237.01,3036.46 C18.1 v1@1239.57,2994.46 ; C14.1 C15.1 ; C15.1@1329.45,3263.9 C15.1 ; v1(1337.01,3218.9) C15.1 ; C2.1 2710,505 2730,525 v1(2745,525) ; v1(3145,380) C3.1 ; C5.1 3200,490 v1(3235,525) ; C6.1 3392.44,415 v1(3430,415) ; v1(4980,3390) C71.1 ; v1(5290,3260) 5292.05,3262.05 SD1.11 ; v1(5295,3515) 5338.58,3515 SD1.12 ; SD1.6 SD1.6 v1(5480,3455) ; v1(5875,3205) SD1.9 ; SD1.10 v1(5875,3605)
  Top Layer w15: v1(528.7,3793.9) C21.1 ; C23.1 v1(1220.31,3893.9)
  other v1: 2900,380 2995,525 1240.41,2993.9
Net1_1: 1.1 D2.2
"NetAnalog Input1_1": "Analog Input1.1" R34.1 | length 165.5
  Top Layer w15: 2800,100 R34.1
"NetAnalog Input1_2": "Analog Input1.2" R35.1 | length 165.5
  Top Layer w15: 2900,100 R35.1
"NetAnalog Input1_3": "Analog Input1.3" R36.1 | length 165.5
  Top Layer w15: 3000,100 R36.1
"NetAnalog Input1_4": "Analog Input1.4" R37.1 | length 165.5
  Top Layer w15: 3100,100 R37.1
"NetAnalog Input1_5": "Analog Input1.5" R38.1 | length 165.5
  Top Layer w15: 3200,100 R38.1
"NetAnalog Input1_6": "Analog Input1.6" R39.1 | length 165.5
  Top Layer w15: 3300,100 R39.1
NetC12_2: C12.2 C13.2 R3.1 U4.22 | length 290
  Top Layer w10: U4.22 1089.21,3236.69 1142.01,3183.9 1277.48,3183.9 R3.1@1287.01,3193.43
NetC14_2: C14.2 C15.2 U4.25 | length 318.9
  Top Layer w10: U4.25 1027.57,3318.2 1330.26,3318.2 C15.2
NetC16_2: C16.2 C17.2 U4.23 | length 224.9
  Top Layer w10: U4.23 1088.62,3262.28 1114.57,3236.34 1187.01,3236.34 C16.2@1237.01,3236.34
NetC18_2: C18.2 C19.2 U4.20 | length 268.3
  Top Layer w10: U4.20 1090.39,3185.51 1152.01,3123.9 1152.01,3098.9 1167.01,3083.9 C19.2 C18.2
NetC20_1: C20.1 U4.1 | length 218.4
  Top Layer w15: C20.1 679.37,3516.54 751.18,3444.72 U4.1
NetC20_2: C20.2 C21.2 R4.1 | length 204.3
  Top Layer w15: C20.2 R4.1
NetC22_1: C22.1 U4.28 | length 209.3
  Top Layer w15: U4.28 1022.83,3464.72 1084.65,3526.54 C22.1@1132.01,3526.54
NetC22_2: C22.2 C23.2 R5.1 | length 199.3
  Top Layer w15: C22.2 R5.1
NetC24_2: C24.2 FB2.2 U5.16
NetC25_2: C25.2 FB1.2 U5.17
NetC26_2: "ISP PGM1.1" C26.2 R9.1 U5.96
NetC29_2: "Power & Reset1.3" C29.2 JTAG/DEBUG1.10 R12.1 RESET1.1 U5.128
NetC30_1: C30.1 U5.13 X1.3
NetC31_2: C31.2 U5.12 X1.1
NetC33_1: C33.1 C34.1 FB6.2 U5.135
NetC33_2: "Digital IO Higher Byte1.3" C33.2 C34.2 FB5.2 U5.137
NetC35_2: C35.2 U5.125 X2.1
NetC36_2: C36.2 U5.126 X2.2
NetC63_2: C63.2 C64.2 FB7.1 U10.8
NetC65_2: C65.2 C66.2 FB8.1 U10.5
NetC67_2: C67.2 FB9.1 R24.1 R25.1
NetC68_2: C68.2 FB10.1 R27.1 R29.1
NetD1_1: D1.1 J1.5 U6.3
NetD1_2: D1.2 R10.1 U6.2
NetDBGEN1_2: DBGEN1.2 R15.2 R16.2
"NetDigital IO Higher Byte1_1": "Digital IO Higher Byte1.1" U5.92
"NetDigital IO Higher Byte1_2": "Digital IO Higher Byte1.2" U5.93
"NetDigital IO Higher Byte1_5": "Digital IO Higher Byte1.5" U5.3
"NetDigital IO Higher Byte1_6": "Digital IO Higher Byte1.6" U5.8
"NetDigital IO Higher Byte1_7": "Digital IO Higher Byte1.7" U5.9
"NetDigital IO Higher Byte1_8": "Digital IO Higher Byte1.8" U5.7
"NetDigital IO Higher Byte1_9": "Digital IO Higher Byte1.9" U5.10
"NetDigital IO Higher Byte1_10": "Digital IO Higher Byte1.10" U5.11
"NetDigital IO Lower Byte1_1": "Digital IO Lower Byte1.1" U5.42
"NetDigital IO Lower Byte1_2": "Digital IO Lower Byte1.2" U5.43
"NetDigital IO Lower Byte1_3": "Digital IO Lower Byte1.3" U5.44
"NetDigital IO Lower Byte1_4": "Digital IO Lower Byte1.4" U5.46
"NetDigital IO Lower Byte1_5": "Digital IO Lower Byte1.5" U5.47
"NetDigital IO Lower Byte1_6": "Digital IO Lower Byte1.6" U5.48
"NetDigital IO Lower Byte1_7": "Digital IO Lower Byte1.7" U5.49
"NetDigital IO Lower Byte1_8": "Digital IO Lower Byte1.8" U5.51
NetFB3_1: FB3.1 U5.23
NetFB4_1: FB4.1 U5.19
NetFB7_2: FB7.2 R27.2 U5.21
NetFB8_2: FB8.2 R24.2 U5.91
NetFB9_2: FB9.2 J2.1
NetFB10_2: FB10.2 J3.1
NetFB11_1: FB11.1 J2.6 J2.7 J2.8 J2.9
NetFB12_1: FB12.1 J3.6 J3.7 J3.8 J3.9
"NetISP PGM2_4": "ISP PGM2.4" U5.82
"NetISP PGM2_5": "ISP PGM2.5" U5.80
NetJ1_4: J1.4 R10.2
NetJ3_4: J3.4 U5.22
NetJTAG/DEBUG1_2: JTAG/DEBUG1.2 U5.30
NetJTAG/DEBUG1_4: JTAG/DEBUG1.4 R18.1 U5.27
NetJTAG/DEBUG1_6: JTAG/DEBUG1.6 R17.1 U5.31
NetJTAG/DEBUG1_8: JTAG/DEBUG1.8 U5.26
NetL1_1: L1.1 U7.7
NetL2_1: L2.1 U8.7
NetL3_1: L3.1 U9.7
NetR1_1: R1.1 U4.17 U5.88 | length 207.3
  Top Layer w10: R1.1 902.01,3033.9 976.85,3108.74 U4.17
NetR2_1: R2.1 U4.16 U5.87 | length 161.3
  Top Layer w10: R2.1 952.01,3058.9 976.26,3083.15 U4.16
NetR4_2: "Stereo Input1.4" R4.2 | length 127
  Top Layer w15: R4.2 680.12,4012.2 725.28,3967.05
NetR5_2: "Stereo Input1.1" R5.2 | length 328.9
  Top Layer w15: 930,3845 930,3946.89 990.32,4007.2 R5.2
NetR6_2: R6.2 U4.2 | length 164.6
  Top Layer w10: U4.2 792.76,3364.65 803.52,3375.41 803.52,3403.51 837.01,3437 R6.2
NetR7_2: R7.2 U4.3 | length 212.7
  Top Layer w10: U4.3 792.17,3339.06 819.52,3366.41 819.52,3396.88 R7.2
NetR8_2: R8.2 U5.24
NetR11_2: R11.2 U5.64 U6.6
NetR13_1: R13.1 U5.29
NetR13_2: R13.2 R14.2 TRST1.2
NetR15_1: R15.1 U5.28
NetR19_1: R19.1 U7.8
NetR20_1: R20.1 U8.8
NetR21_1: R21.1 U9.8
NetR22_2: R22.2 U5.72 U10.3
NetR23_2: R23.2 U5.83 U10.2
NetR34_2: R34.2 U1.1 U1.2 U5.136 | length 179.6
  Top Layer w10: U1.1 U1.2 2795,450 2800,445 R34.2
NetR35_2: R35.2 U1.4 U1.5 U5.138 | length 149.7
  Top Layer w10: U1.5 U1.4 2841.42,383.11 R35.2
NetR36_2: R36.2 U2.1 U2.2 U5.139 | length 195.3
  Top Layer w10: R36.2 3045,369.53 3045,440 3035,450 U2.2 U2.1
NetR37_2: R37.2 U2.4 U2.5 U5.142 | length 129.6
  Top Layer w10: U2.5@3090,450 3090,334.53 R37.2
NetR38_2: R38.2 U3.1 U3.2 U5.144 | length 213.9
  Top Layer w10: R38.2 3290,414.53 3290,440 3280,450 U3.2 U3.1
NetR39_2: R39.2 U3.4 U3.5 U5.143 | length 138.5
  Top Layer w10: R39.2 3300,365 3331.42,396.42 U3.4 U3.5
NetR40_2: R40.2 SD1.1 U5.55 | length 216.7
  Top Layer w10: R40.2 5381.85,3200 SD1.1
NetR41_2: R41.2 SD1.2 U5.56 | length 404.6
  Top Layer w10: R41.2 5445,3150 5470,3175 5470,3260 5448.27,3281.73 SD1.2
NetR42_2: R42.2 SD1.3 U5.50 | length 255
  Top Layer w10: R42.2 5219.53,3289.53 5255.04,3325.04 SD1.3
NetR43_2: R43.2 SD1.5 U5.45 | length 282.6
  Top Layer w10: R43.2 5219.53,3465.47 5273.35,3411.65 SD1.5
NetR44_2: R44.2 SD1.7 U5.52 | length 402.5
  Top Layer w10: R44.2 5450,3625 5470,3605 5470,3520 5448.27,3498.27 SD1.7
NetR45_2: R45.2 SD1.8 U5.53 | length 214.6
  Top Layer w10: R45.2 5386.85,3575 SD1.8
NetRTCALARM1_1: RTCALARM1.1 U5.129
NetSSP1_1: SSP1.1@4685,1095
NetSSP1_2: SSP1.2
NetSSP1_3: SSP1.3
NetSSP1_5: SSP1.5
"NetStereo Output1_1": "Stereo Output1.1" U4.19 | length 1135
  Top Layer w15: v1(947.01,3158.9) 948.03,3159.92 U4.19
  Bottom Layer w15: v1(947.01,3158.9) 928.01,3177.9 928.01,3420.2 1116.71,3608.9 1306.71,3608.9 1540,3842.19 1540,3845
"NetStereo Output1_4": "Stereo Output1.4" U4.18 | length 1243.2
  Top Layer w15: v1(922.01,3123.9) 962.01,3123.9 972.44,3134.33 U4.18
  Bottom Layer w15: v1(922.01,3123.9) 907.01,3138.9 907.01,3428.9 1108.01,3629.9 1298.01,3629.9 1335.28,3667.17 1335.28,3967.05
NetU4_4: U4.4 U5.14
NetU4_5: U4.5 U5.118
NetU4_6: U4.6 U5.121
NetU4_7: U4.7 U5.32
NetU4_8: U4.8 U5.112
NetU4_9: U4.9 U5.68
NetU4_10: U4.10 U5.116
NetU4_11: U4.11 U5.114
NetU4_14: U4.14 U5.119
NetU4_15: U4.15 U5.122
NetU5_69: U5.69 U10.4
NetU5_79: U5.79 U10.1
NetU5_130: U5.130 WAKEUP1.1
USB0_N: J3.2 R33.1 U5.20
USB0_P: J3.3 R32.1 U5.18
USB1_N: J2.2 R26.2 R31.1
USB1_P: J2.3 R28.2 R30.1
USB_1_N: C69.2 R26.1 U5.90
USB_1_P: C70.2 R28.1 U5.89
VIN: "Power & Reset1.8" C51.1 C52.1 C53.2 C56.2 C59.2 D2.1 U7.2 U7.3 U8.2 U8.3 U9.2 U9.3
pads on no net: "ISP PGM2.2" "ISP PGM2.6" "Power & Reset1.1" "Stereo Input1.3" "Stereo Input1.6" "Stereo Input1." "Stereo Output1.3" "Stereo Output1.6" "Stereo Output1." J1.1 J1.2 J1.3 J1.E J2.4 J2.GND J3.GND JTAG/DEBUG1.1@3009.41,3453.5 JTAG/DEBUG1.7 SSP1.1@4615,1165 U5.1 U5.2 U5.6 U5.15 U5.33 U5.34 U5.35 U5.37 U5.38 U5.39 U5.54 U5.57 U5.58 U5.60 U5.61 U5.62 U5.63 U5.65 U5.66 U5.67 U5.70 U5.73 U5.74 U5.75 U5.78 U5.81 U5.84 U5.85 U5.86 U5.95 U5.97 U5.98 U5.99 U5.100 U5.101 U5.102 U5.103 U5.104 U5.105 U5.106 U5.108 U5.110 U5.113 U5.115 U5.117 U5.120 U5.123 U5.124 U5.132 U5.133 U5.134 U5.140 U6.1 U6.4 U6.7

## Silkscreen, mask and mechanical layers (free items; w line width, h text height)
Mechanical 15:
  circle w5: c3400,300 r62.5
  circle w5: c3400,1400 r62.5
  circle w5: c1400,2000 r62.5
  lines w5: 0,0 0,2100 3340,2100 3400,2040 3400,1600 3500,1500 3500,200 3400,100 3400,0 0,0

## Text inside footprints (layer, text, board x,y; h text height)
"Analog Input1": Top Overlay "A5" at 3325,160 h78.74 r90; Top Overlay "A4" at 3225,160 h78.74 r90; Top Overlay "A3" at 3125,160 h78.74 r90; Top Overlay "A2" at 3020,160 h78.74 r90; Top Overlay "A1" at 2920,160 h78.74 r90; Top Overlay "A0" at 2820,160 h78.74 r90
C51: Top Overlay "+" at 1245,85 h59.06 r90
C52: Top Overlay "+" at 965,85 h59.06 r90
"Digital IO Higher Byte1": Top Overlay "8" at 2465,1890 h78.74 r90; Top Overlay "~ 9" at 2365,1835 h78.74 r90; Top Overlay "~ 10" at 2265,1795 h78.74 r90; Top Overlay "~ 11" at 2160,1795 h78.74 r90; Top Overlay "12" at 2065,1855 h78.74 r90; Top Overlay "~ 13" at 1965,1800 h78.74 r90; Top Overlay "GND" at 1865,1805 h78.74 r90; Top Overlay "AREF" at 1760,1770 h78.74 r90; Top Overlay "SDA" at 1655,1810 h78.74 r90; Top Overlay "SCL" at 1565,1815 h78.74 r90
"Digital IO Lower Byte1": Top Overlay "RX 0" at 3325,1785 h78.74 r90; Top Overlay "TX 1" at 3220,1790 h78.74 r90; Top Overlay "2" at 3125,1890 h78.74 r90; Top Overlay "~ 3" at 3025,1835 h78.74 r90; Top Overlay "4" at 2925,1890 h78.74 r90; Top Overlay "~ 5" at 2825,1835 h78.74 r90; Top Overlay "~ 6" at 2725,1835 h78.74 r90; Top Overlay "7" at 2625,1895 h78.74 r90
"Power & Reset1": Top Overlay "VIN" at 2625,170 h78.74 r90; Top Overlay "GND" at 2525,170 h78.74 r90; Top Overlay "GND" at 2420,170 h78.74 r90; Top Overlay "5V" at 2320,170 h78.74 r90; Top Overlay "3.3V" at 2225,170 h78.74 r90; Top Overlay "RESET" at 2120,170 h78.74 r90; Top Overlay "IOREF" at 2025,170 h78.74 r90